# EAGLE board 2364_ROM-el_v1 (EAGLE 7.7.0)
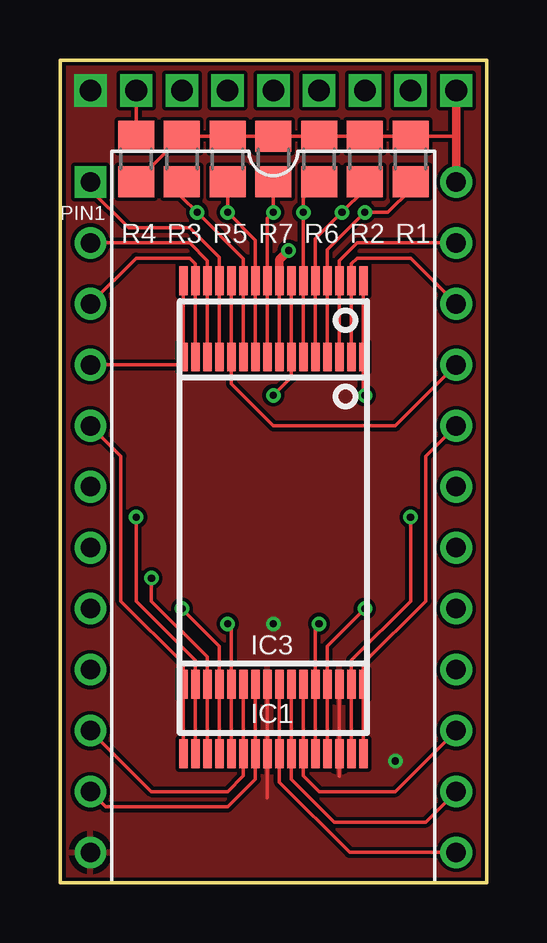
[diagram p0: board, top side]
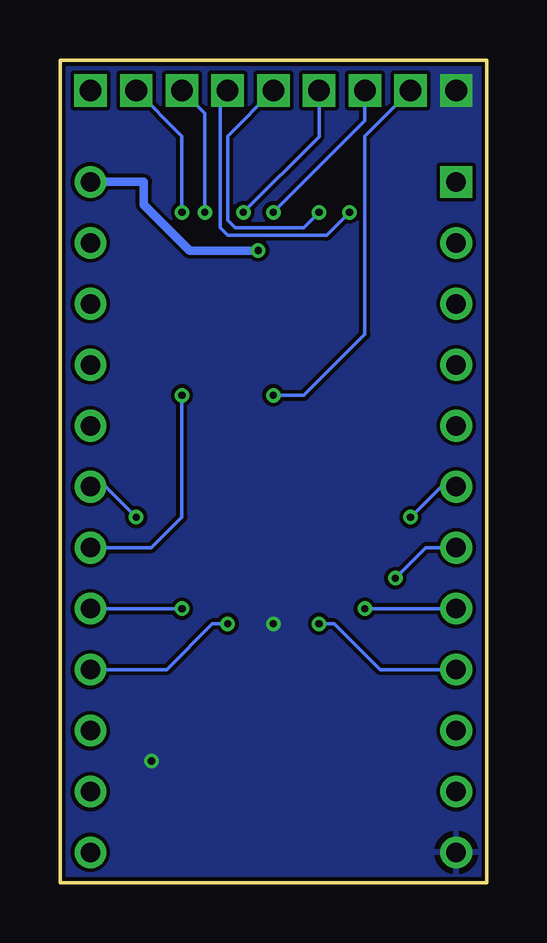
[diagram p1: board, bottom side, seen from below]

Size 17.78 x 34.29 mm. Coordinates in mm from the lower left corner, seen from the top.
Outline: 0,34.29 0,0 17.78,0 17.78,34.29 0,34.29
Copper layers (1*16): Top 0.035mm / dielectric 1.5mm / Bottom 0.035mm
Design rules "hackvana *": minimum track width 6mil, minimum drill 0.3mm, track to track 6mil, track to pad 6mil, pad to pad 6mil, via to via 6mil, smd to smd 0mil, copper to edge 6mil, drill to drill 6mil, minimum pad ring 10mil, minimum via ring 6mil, stop-mask expansion 2mil, vias tented up to drill 100mil, thermal gap 10mil

## Footprints (pad centres in the part's own frame; a part is rotated, then mirrored left to right if it is on the bottom)
TSOP32 = smd 1.2 x 0.36: 1 -9.85,3.75; 2 -9.85,3.25; 3 -9.85,2.75; 4 -9.85,2.25; 5 -9.85,1.75; 6 -9.85,1.25; 7 -9.85,0.75; 8 -9.85,0.25; 9 -9.85,-0.25; 10 -9.85,-0.75; 11 -9.85,-1.25; 12 -9.85,-1.75; 13 -9.85,-2.25; 14 -9.85,-2.75; 15 -9.85,-3.25; 16 -9.85,-3.75; 17 9.85,-3.75; 18 9.85,-3.25; 19 9.85,-2.75; 20 9.85,-2.25; 21 9.85,-1.75; 22 9.85,-1.25; 23 9.85,-0.75; 24 9.85,-0.25; 25 9.85,0.25; 26 9.85,0.75; 27 9.85,1.25; 28 9.85,1.75; 29 9.85,2.25; 30 9.85,2.75; 31 9.85,3.25; 32 9.85,3.75
VSOP32 = smd 1.2 x 0.36: 1 -7.31,3.75; 2 -7.31,3.25; 3 -7.31,2.75; 4 -7.31,2.25; 5 -7.31,1.75; 6 -7.31,1.25; 7 -7.31,0.75; 8 -7.31,0.25; 9 -7.31,-0.25; 10 -7.31,-0.75; 11 -7.31,-1.25; 12 -7.31,-1.75; 13 -7.31,-2.25; 14 -7.31,-2.75; 15 -7.31,-3.25; 16 -7.31,-3.75; 17 6.322,-3.75; 18 6.322,-3.25; 19 6.322,-2.75; 20 6.322,-2.25; 21 6.322,-1.75; 22 6.322,-1.25; 23 6.322,-0.75; 24 6.322,-0.25; 25 6.322,0.25; 26 6.322,0.75; 27 6.322,1.25; 28 6.322,1.75; 29 6.322,2.25; 30 6.322,2.75; 31 6.322,3.25; 32 6.322,3.75
DIL24-ROUNDPAD = drill 0.813 square: 1 -13.97,-7.62 | drill 0.813: 2 -11.43,-7.62; 3 -8.89,-7.62; 4 -6.35,-7.62; 5 -3.81,-7.62; 6 -1.27,-7.62; 7 1.27,-7.62; 8 3.81,-7.62; 9 6.35,-7.62; 10 8.89,-7.62; 11 11.43,-7.62; 12 13.97,-7.62; 13 13.97,7.62; 14 11.43,7.62; 15 8.89,7.62; 16 6.35,7.62; 17 3.81,7.62; 18 1.27,7.62; 19 -1.27,7.62; 20 -3.81,7.62; 21 -6.35,7.62; 22 -8.89,7.62; 23 -11.43,7.62; 24 -13.97,7.62
R0805 = smd 1.3 x 1.5: 1 -0.95,0; 2 0.95,0

## Placement (x,y rotation side)
IC1  [TSOP32]  8.89,15.24 270 top
IC2  [VSOP32]  8.89,14.61 270 top
IC3  2364  [DIL24-ROUNDPAD]  8.89,15.24 270 top
R1  [R0805]  14.61,30.16 90 top
R2  [R0805]  12.7,30.16 90 top
R3  [R0805]  5.08,30.16 90 top
R4  [R0805]  3.18,30.16 270 top
R5  [R0805]  6.99,30.16 90 top
R6  [R0805]  10.79,30.16 90 top
R7  [R0805]  8.89,30.16 90 top

## Library data of the parts
IC1 IC2 = memory-jedec
IC3 = commodore
R1-R7 = resistor

## Nets
!WE: IC1.7 IC2.7 R4.1
A0: IC1.20 IC2.20 IC3.8
A1: IC1.19 IC2.19 IC3.7
A2: IC1.18 IC2.18 IC3.6
A3: IC1.17 IC2.17 IC3.5
A4: IC1.16 IC2.16 IC3.4
A5: IC1.15 IC2.15 IC3.3
A6: IC1.14 IC2.14 IC3.2
A7: IC1.13 IC2.13 IC3.1
A8: IC1.3 IC2.3 IC3.23
A9: IC1.2 IC2.2 IC3.22
A10: IC1.31 IC2.31 IC3.19
A11: IC1.1 IC2.1 IC3.18
A12: IC1.12 IC2.12 IC3.21
A13: IC1.4 IC2.4 R1.1
A14: IC1.5 IC2.5 R2.1
A15: IC1.11 IC2.11 R3.1
A16: IC1.10 IC2.10 R5.1
A17: IC1.6 IC2.6 R6.1
A18: IC1.9 IC2.9 R7.1
D0: IC1.21 IC2.21 IC3.9
D1: IC1.22 IC2.22 IC3.10
D2: IC1.23 IC2.23 IC3.11
D3: IC1.25 IC2.25 IC3.13
D4: IC1.26 IC2.26 IC3.14
D5: IC1.27 IC2.27 IC3.15
D6: IC1.28 IC2.28 IC3.16
D7: IC1.29 IC2.29 IC3.17
GND: IC1.24 IC1.30 IC2.24 IC2.30 IC3.12
N$1: IC1.32 IC2.32 IC3.20
VCC: IC1.8 IC2.8 IC3.24 R1.2 R2.2 R3.2 R4.2 R5.2 R6.2 R7.2

## Tracks (layer width: path | path; a pad name or v marks a point on that pad's centre or on a via)
!WE  (via drill 0.3, 0.9)
  Top 0.152: v8.89,20.32 9.64,21.07 IC2.7 IC1.7 | v3.18,33.02 R4.1
  Bottom 0.152: v8.89,20.32 7.62,20.32 5.08,22.86 5.08,31.11 v3.18,33.02
A0  (via drill 0.3)
  Top 0.152: IC1.20 IC2.20 6.64,9.87 v5.08,11.43
  Bottom 0.152: IC3.8 v5.08,11.43
A1  (via drill 0.3)
  Top 0.152: IC1.19 IC2.19 6.14,9.42 3.81,11.75 v3.81,12.7
  Bottom 0.152: IC3.7 2.54,13.97 v3.81,12.7
A2  (via drill 0.3)
  Top 0.152: v3.18,15.24 3.18,11.75 5.64,9.28 IC2.18 IC1.18
  Bottom 0.152: IC3.6 1.91,16.51 v3.18,15.24
A3
  Top 0.152: IC3.5 2.54,17.78 2.54,11.75 5.14,9.15 IC2.17 IC1.17
A4
  Top 0.152: IC1.16 IC2.16 5.14,21.59 IC3.4
A5
  Top 0.152: IC3.3 3.18,26.04 5.4,26.04 5.64,25.79 IC1.15 IC2.15
A6
  Top 0.152: IC3.2 5.4,26.67 6.14,25.93 IC1.14 IC2.14
A7
  Top 0.152: IC3.1 1.27,28.89 2.86,27.3 5.4,27.3 6.64,26.06 IC1.13 IC2.13
A8
  Top 0.152: IC3.23 12.38,26.67 11.64,25.93 IC1.3 IC2.3
A9
  Top 0.152: IC2.2 IC1.2 12.14,25.79 12.38,26.04 14.61,26.04 IC3.22
A10  (via drill 0.3)
  Top 0.152: IC1.31 IC2.31 12.14,9.28 14.61,11.75 v14.61,15.24
  Bottom 0.152: IC3.19 15.88,16.51 v14.61,15.24
A11  (via drill 0.3)
  Top 0.152: IC1.1 IC2.1 12.64,20.32 v12.7,20.32
  Bottom 0.152: v12.7,20.32 12.7,15.24 13.97,13.97 IC3.18
A12
  Top 0.152: IC1.12 IC2.12 7.14,20.8 8.89,19.05 13.97,19.05 IC3.21
A13  (via drill 0.3, 0.9)
  Top 0.152: R1.1 14.61,28.89 13.65,27.94 v12.7,27.94 11.14,26.38 IC1.4 IC2.4
  Bottom 0.152: v12.7,27.94 12.7,31.11 v14.61,33.02
A14  (via drill 0.3, 0.9)
  Top 0.152: R2.1 12.7,28.89 v11.75,27.94 10.64,26.83 IC1.5 IC2.5
  Bottom 0.152: v11.75,27.94 11.75,32.07 v12.7,33.02
A15  (via drill 0.3, 0.9)
  Top 0.152: R3.1 5.08,28.57 v5.72,27.94 7.64,26.02 IC1.11 IC2.11
  Bottom 0.152: 5.72,27.96 v5.72,27.94 6.67,26.99 10.79,26.99 11.11,27.3 11.11,32.7 v10.79,33.02
A16  (via drill 0.3, 0.9)
  Top 0.152: R5.1 v6.99,27.94 8.14,26.79 IC1.10 IC2.10
  Bottom 0.152: v8.89,33.02 10.79,31.11 10.79,27.62 10.48,27.3 7.62,27.3 v6.99,27.94
A17  (via drill 0.3, 0.9)
  Top 0.152: IC2.6 IC1.6 v10.14,27.94 10.14,28.56 R6.1 | IC2.6 10.14,21.61 10.16,21.59 10.16,21.89 IC2.6
  Bottom 0.152: v6.99,33.02 6.99,31.09 v10.14,27.94
A18  (via drill 0.3, 0.9)
  Top 0.152: IC2.9 IC1.9 8.64,27.69 v8.89,27.94 R7.1
  Bottom 0.152: v5.08,33.02 5.08,31.75 v8.89,27.94
D0  (via drill 0.3)
  Top 0.152: IC1.21 IC2.21 7.14,10.64 v6.99,10.79
  Bottom 0.152: v6.99,10.79 6.35,10.79 4.45,8.89 IC3.9
D1
  Top 0.152: IC3.10 3.81,3.81 6.99,3.81 7.64,4.46 IC1.22 IC2.22
D2
  Top 0.152: IC3.11 1.91,3.17 6.99,3.17 8.14,4.33 IC1.23 IC2.23
D3
  Top 0.152: IC3.13 12.07,1.27 9.14,4.2 IC1.25 IC2.25
D4
  Top 0.152: IC3.14 15.24,2.54 11.43,2.54 9.64,4.33 IC1.26 IC2.26
D5
  Top 0.152: IC3.15 13.97,3.81 10.79,3.81 10.14,4.46 IC1.27 IC2.27
D6  (via drill 0.3)
  Top 0.152: v10.79,10.79 10.64,10.64 IC2.28 IC1.28
  Bottom 0.152: v10.79,10.79 11.43,10.79 13.34,8.89 IC3.16
D7  (via drill 0.3)
  Top 0.152: IC1.29 IC2.29 11.14,9.87 v12.7,11.43
  Bottom 0.152: IC3.17 v12.7,11.43
GND  (via drill 0.3, 0.9)
  Top 0.152: 8.64,3.56 IC1.24 IC2.24 | 11.64,4.45 IC1.30 IC2.30
  other vias: 13.97,5.08 8.89,10.79 1.27,33.02
  pour Top: 17.78,0 0,0 0,34.29 17.78,34.29
  pour Bottom: 17.78,0 0,0 0,34.29 17.78,34.29
N$1
  Top 0.152: IC1.32 IC2.32 12.64,9.15 15.24,11.75 15.24,17.78 IC3.20
VCC  (via drill 0.3, 0.9)
  Top 0.152: IC3.24 16.51,30.48 | IC2.8 IC1.8 | 16.51,31.11 R1.2 R2.2 R6.2 R7.2 R5.2 R3.2 R4.2
  Top 0.356: IC3.24 16.51,31.11 v16.51,33.02 | IC1.8 9.14,25.97 v9.53,26.35
  Bottom 0.356: IC3.24 14.29,29.21 14.29,28.26 12.38,26.35 v9.53,26.35

## Text on the board
tNames: PIN1
tValues: GND | !WE | 18 | 17 | 16 | 15 | 14 | 13 | VCC | ROM-el | www.go4retro.com | (c)2009-17 RETRO Innovations